# Altium PCB single channel esc.PcbDoc
Units mil, origin at the board's own origin, x right, y up, seen from the top; angles counter-clockwise.
Board outline 1580 x 830 mil, 6 copper layers (Top Layer, Layer 1, Layer 2, Layer 3, Layer 5, Bottom Layer), stack 32.112 mil thick; 44 components, 38 nets, 189 pads, 325 vias.
Unrouted connection lines stored in the file: 100.
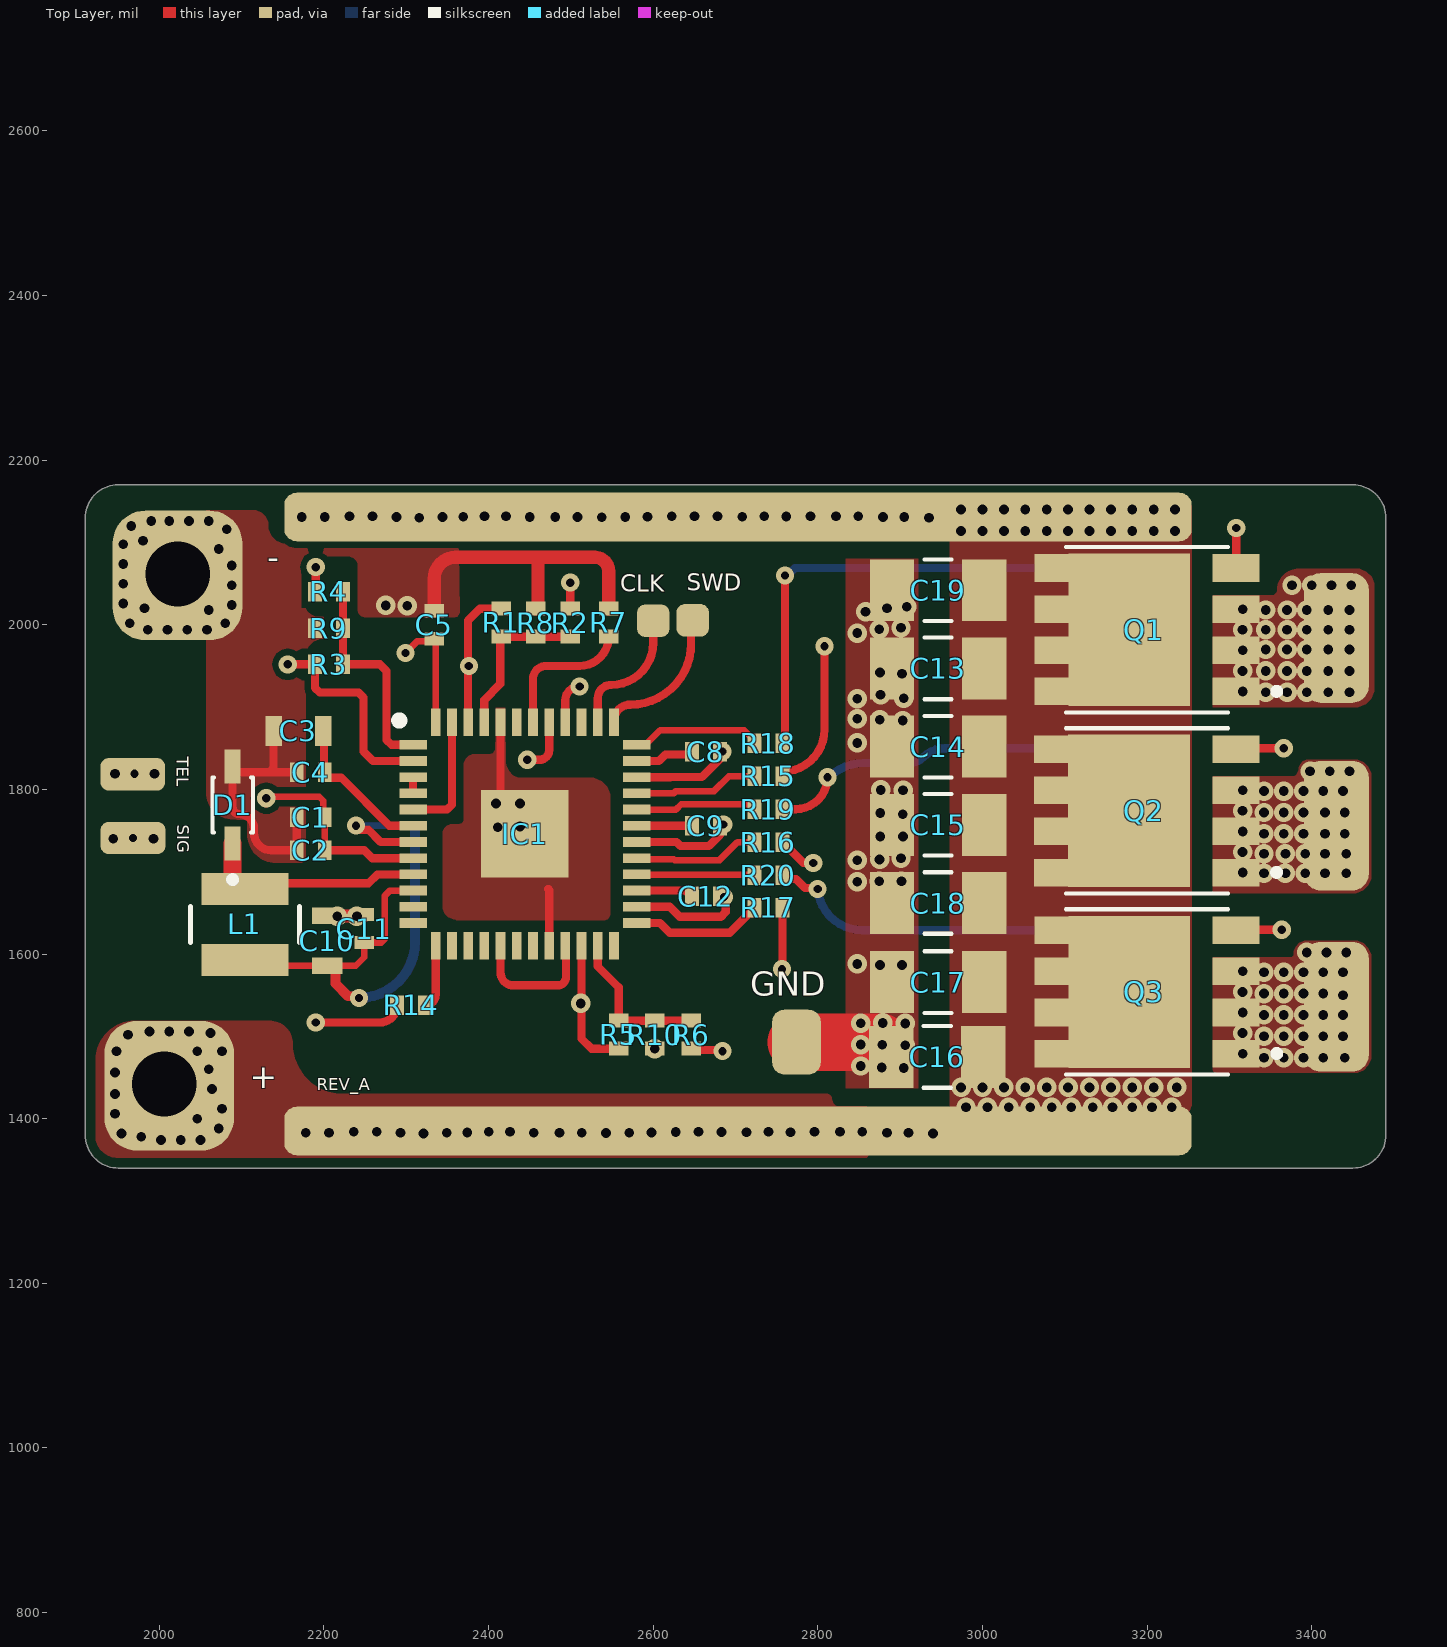
[diagram p0: Top Layer view]
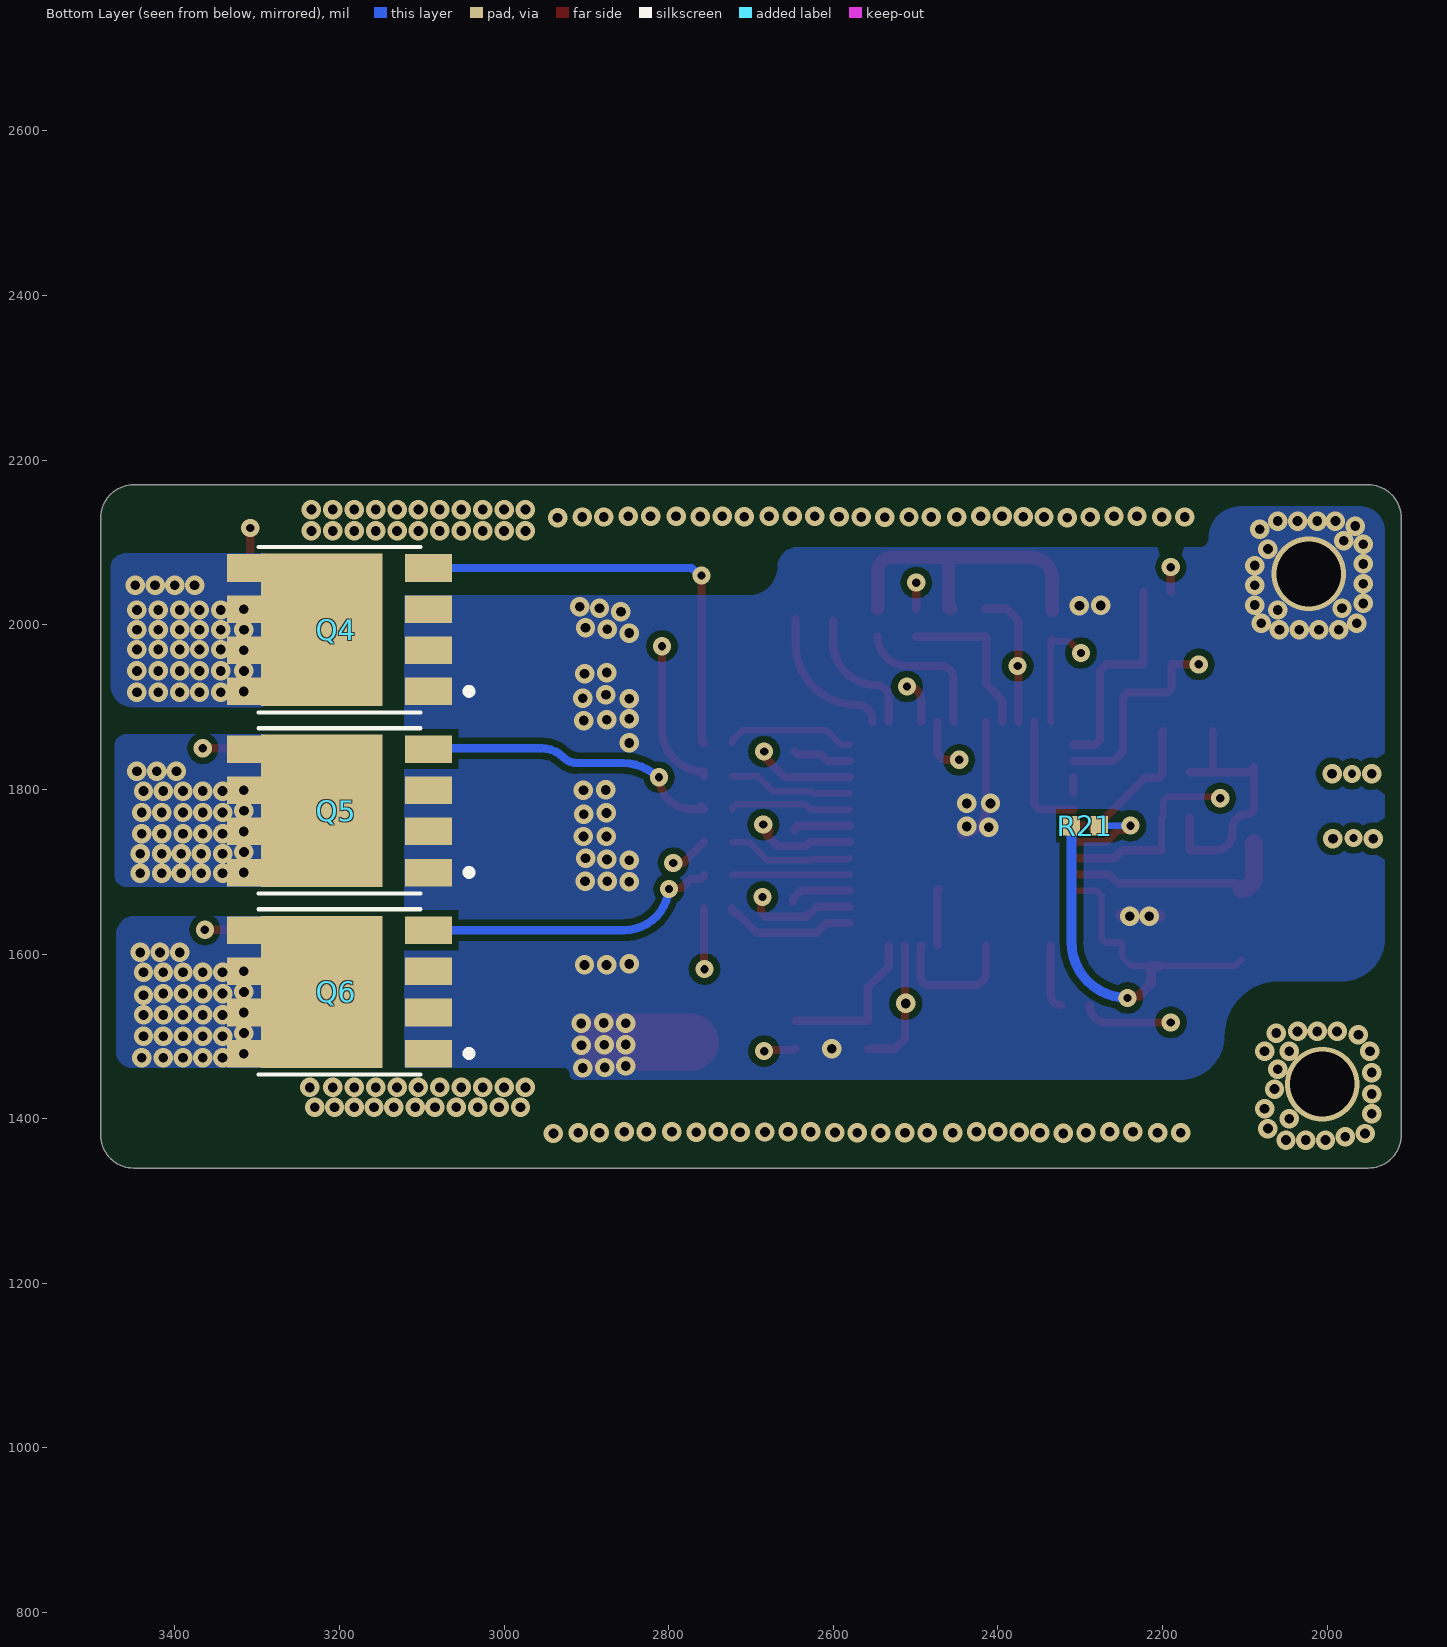
[diagram p1: Bottom Layer view, seen from below]
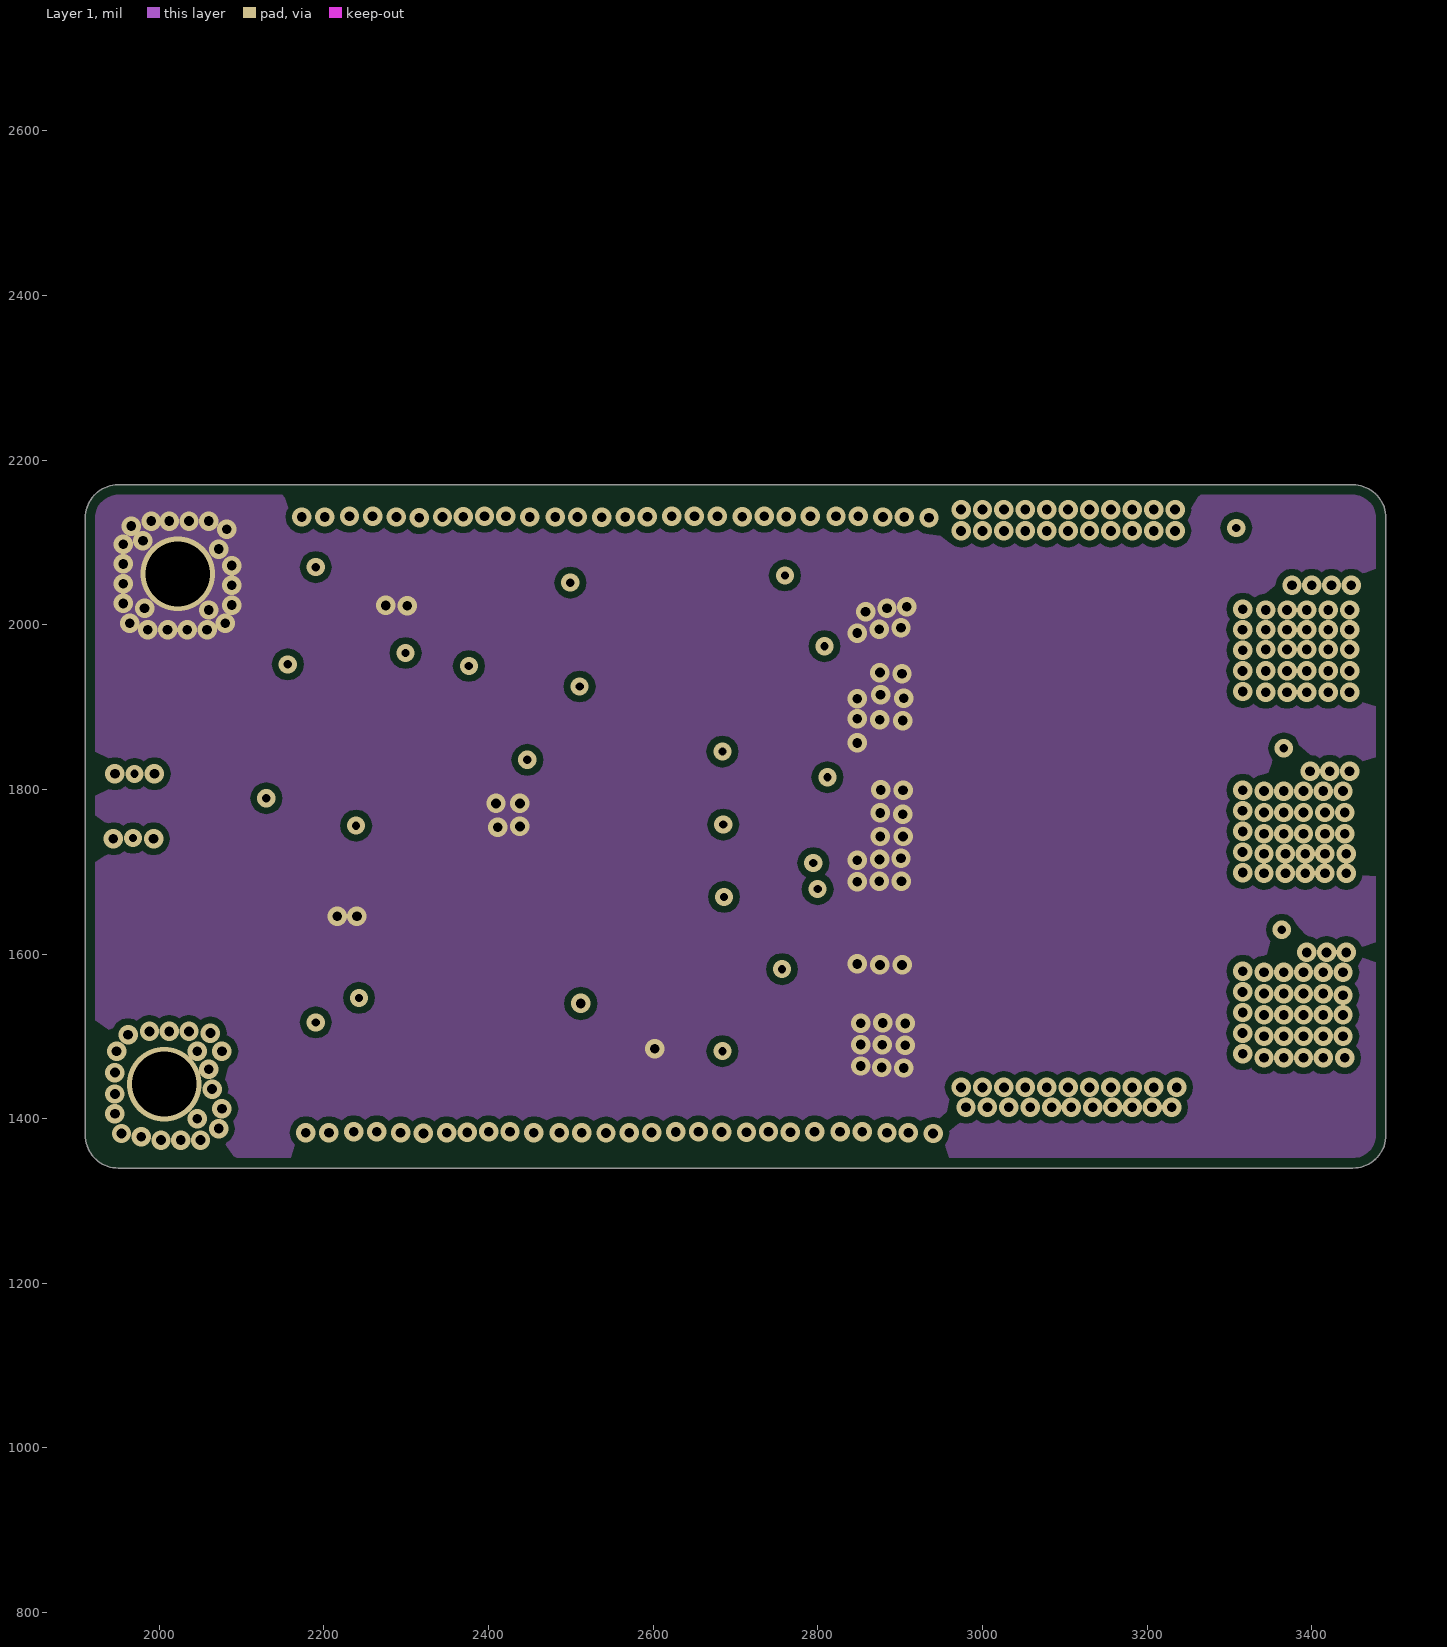
[diagram p2: Layer 1]
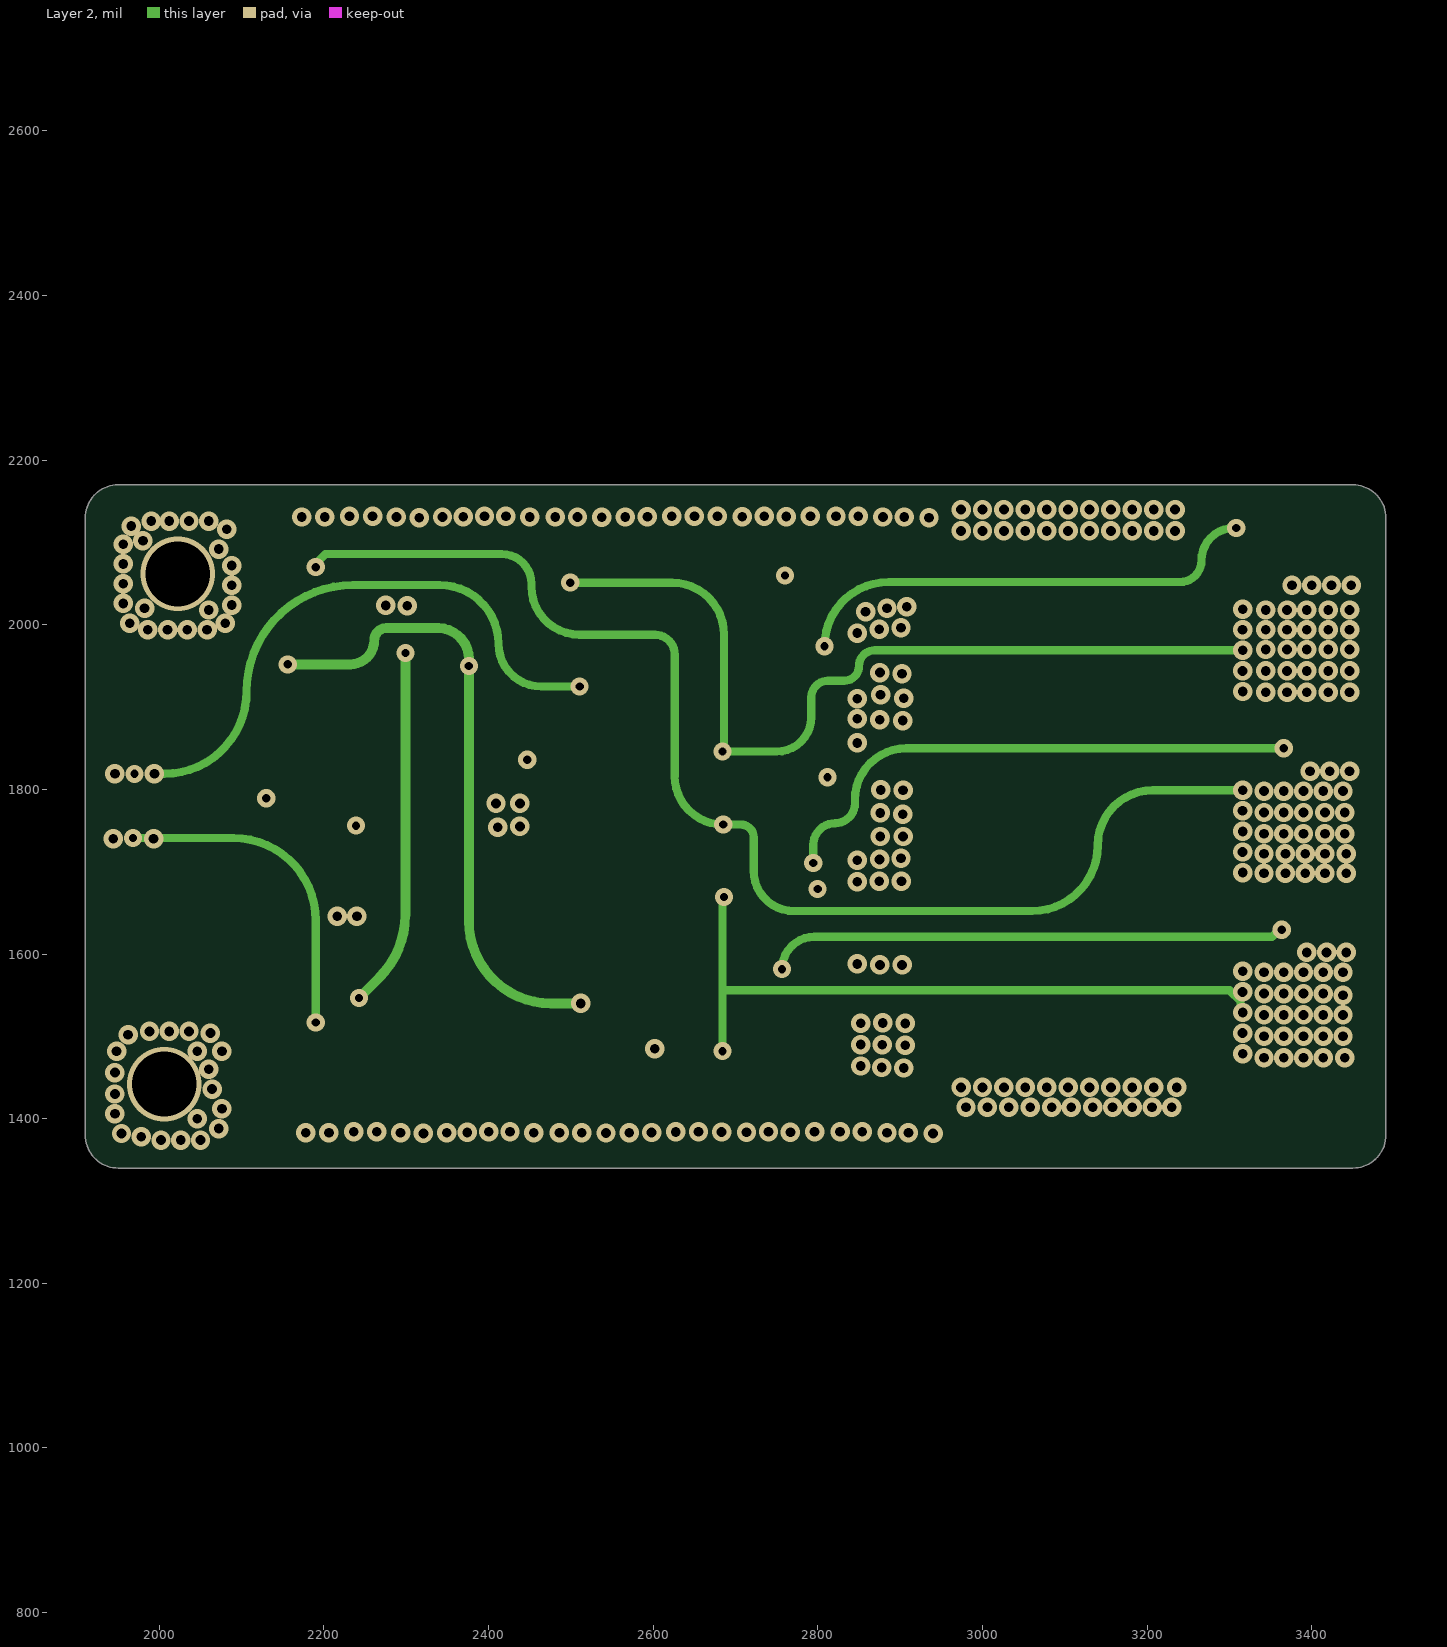
[diagram p3: Layer 2]
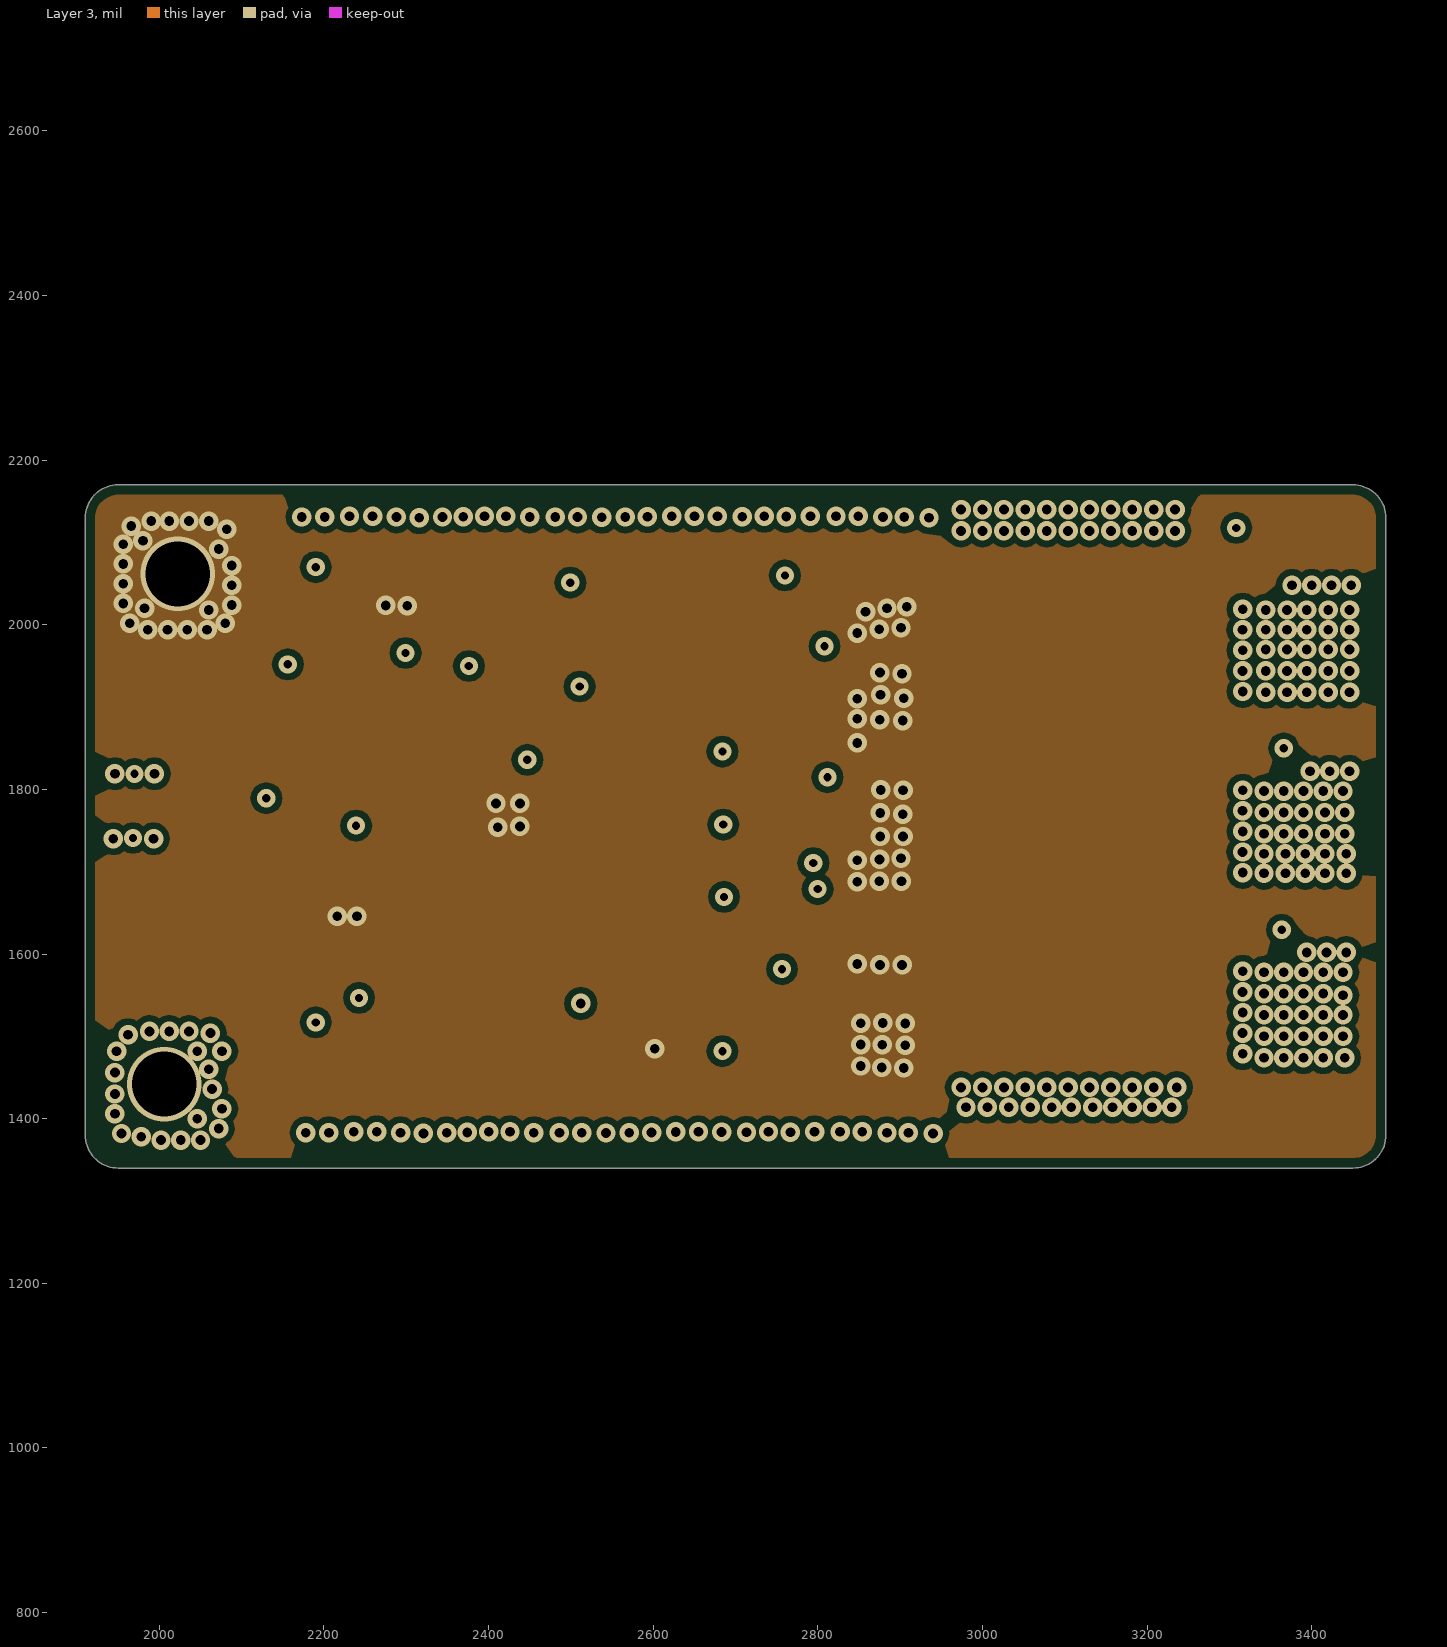
[diagram p4: Layer 3]
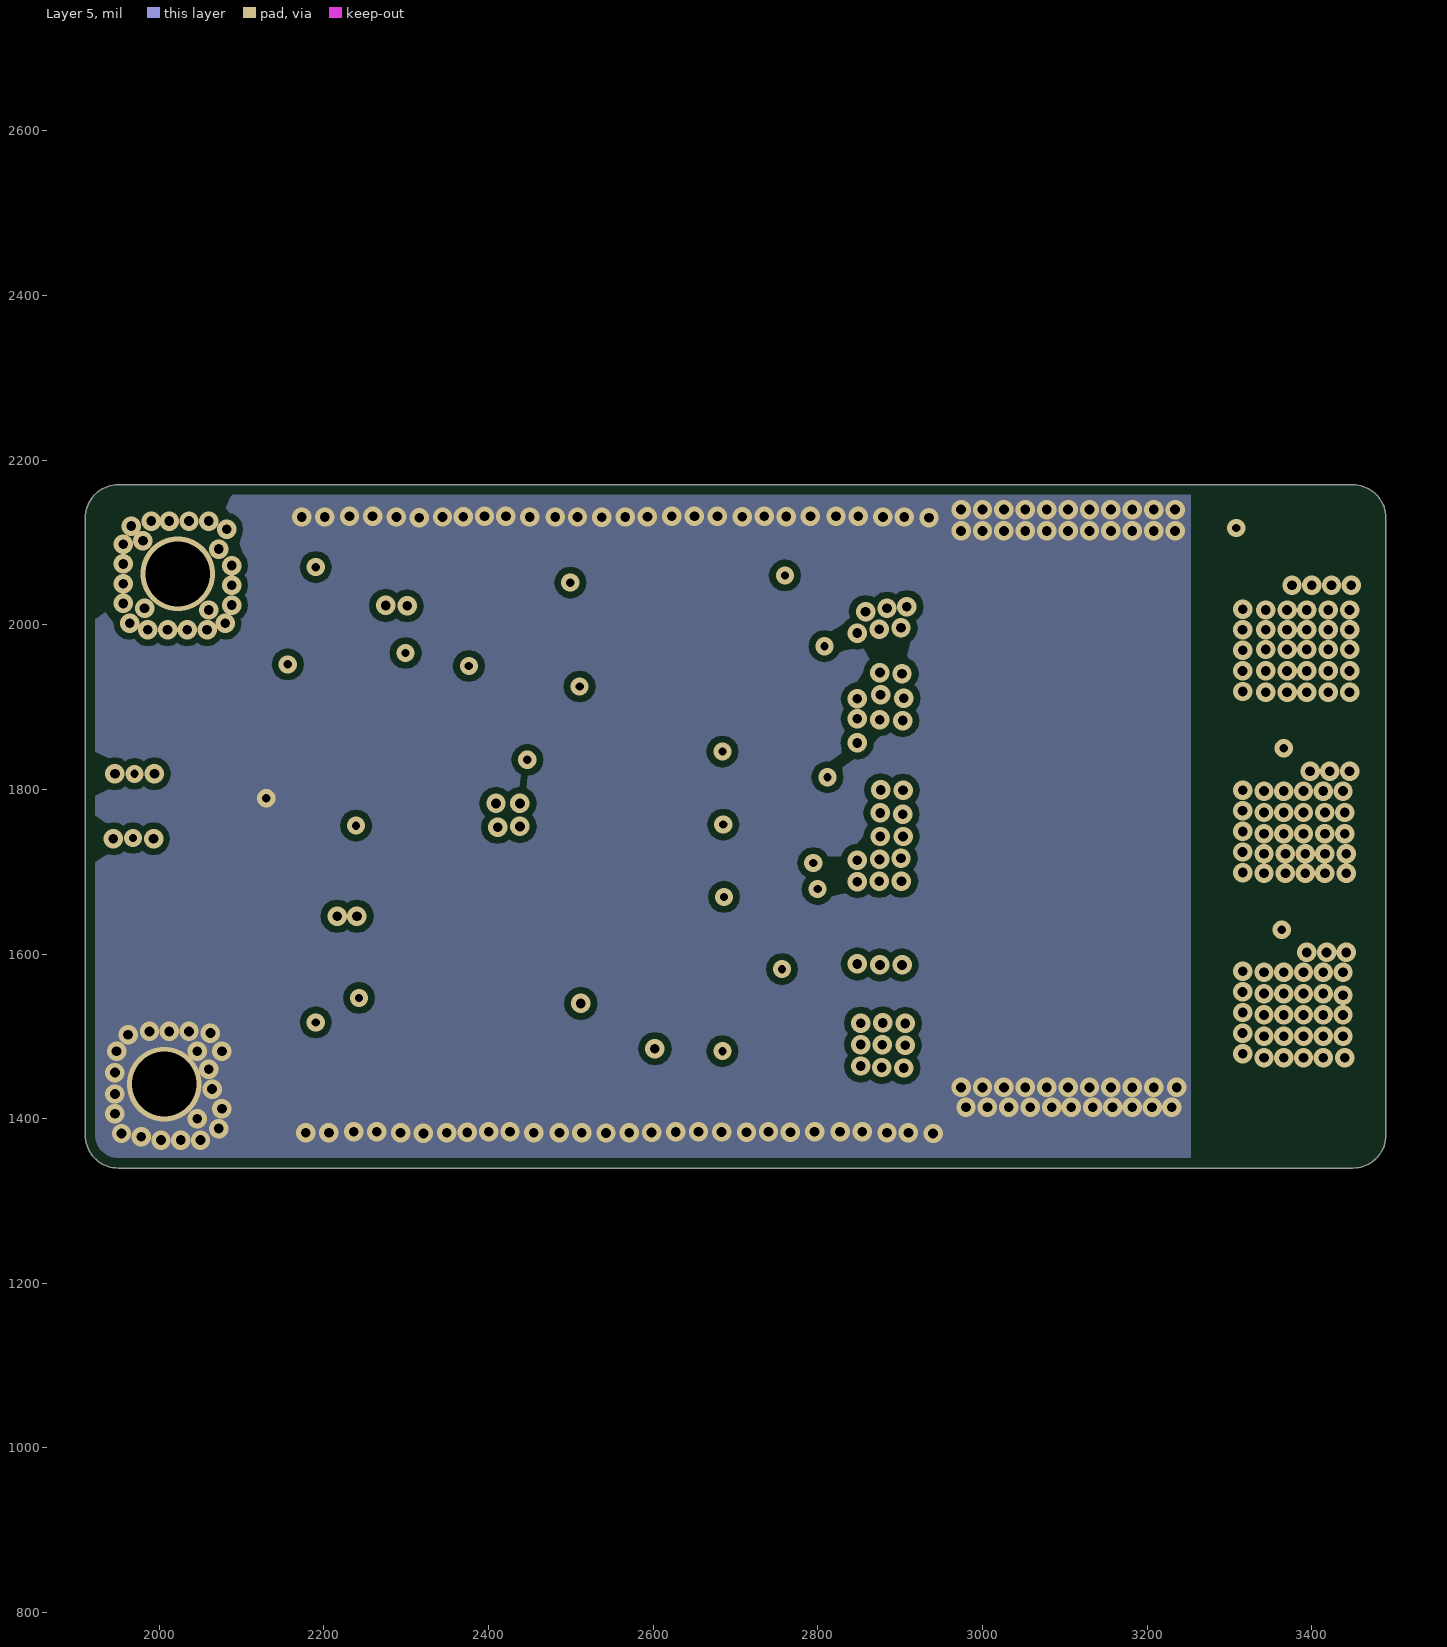
[diagram p5: Layer 5]
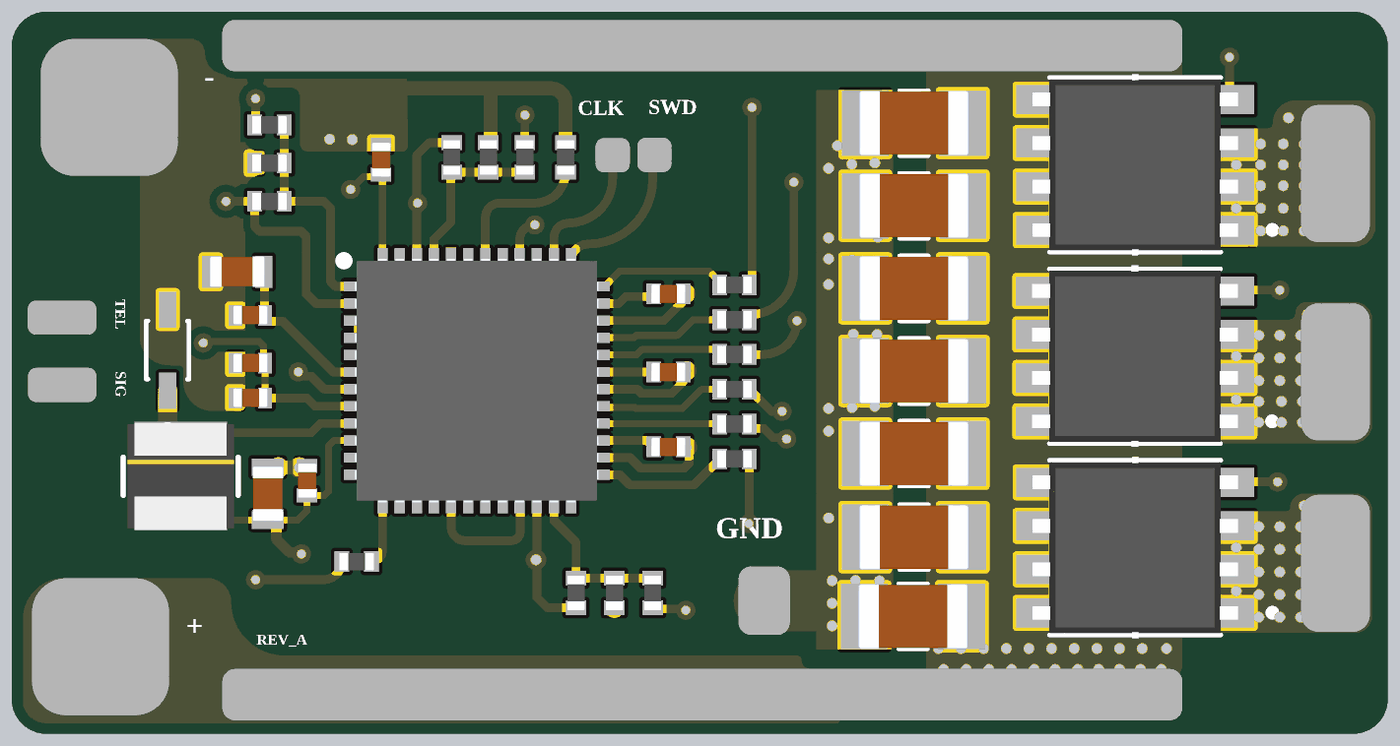
[diagram p6: 3D render of the assembled board from above, using the file's embedded part models]
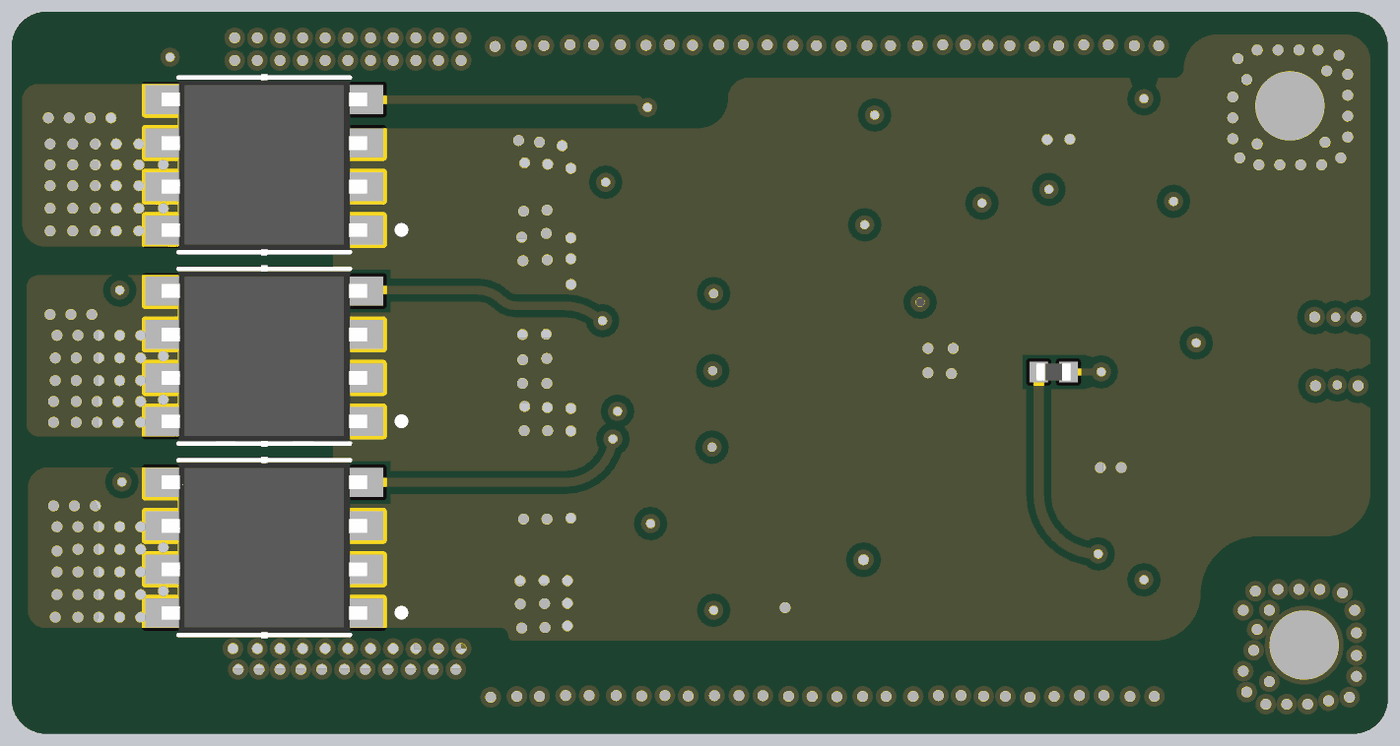
[diagram p7: 3D render of the assembled board from below, using the file's embedded part models]

## Layer stack, top to bottom
Top Solder: solder mask 0.4, Solder Resist, Dk 3.5
Top Layer: signal copper 1.4
Dielectric 4: prepreg 2.8, PP-006, Dk 4.1
Layer 1: signal copper 1.378
Dielectric 2: prepreg 2.8, PP-006, Dk 4.1
Layer 2: signal copper 1.378
Dielectric 1: dielectric 12.6, FR-4, Dk 4.8
Layer 3: signal copper 1.378
Dielectric 3: prepreg 2.8, PP-006, Dk 4.1
Layer 5: signal copper 1.378
Dielectric 5: prepreg 2.8, PP-006, Dk 4.1
Bottom Layer: signal copper 1.4
Bottom Solder: solder mask 0.4, Solder Resist, Dk 3.5

## Board outline
1910,1380 ccw(c1950,1380) 1950,1340 3450,1340 ccw(c3450,1380) 3490,1380 3490,2130 ccw(c3450,2130) 3450,2170 3090,2170 1950,2170 ccw(c1950,2130) 1910,2130

## Design rules (kind name [scope] priority, off if disabled: settings)
BoardOutlineClearance [All] p1: gap=12 ignorepadtopadclearanceinfootprint=FALSE
Clearance [All] p1: gap=8 ignorepadtopadclearanceinfootprint=TRUE
HoleSize [All] p1: absolutevalues=TRUE maxlimit=100 minlimit=10 maxpercent=80.000 minpercent=20.000
MinimumAnnularRing [All] p1: minimumring=5.2
PlaneConnect [All] p1: planeconnectstyle=Direct reliefexpansion=20 reliefentries=4 reliefconductorwidth=10 reliefairgap=10
PolygonConnect [All] p1: connectstyle=Direct reliefconductorwidth=10 reliefentries=4 polygonreliefangle="90 Angle" airgapwidth=10
RoutingVias [All] p1: holewidth=11.81 width=23.62 viastyle="Through Hole" minholewidth=10 minwidth=22 maxholewidth=400 maxwidth=400
SolderMaskExpansion [All] p1: expansion=4 istentingtop=FALSE
Width [All] p1: maxlimit=400 minlimit=8 preferedwidth=10
28 further rules are at their usual default settings.

## Components (designator, comment, footprint, x,y, rotation, side; value= is the part's Value field where it differs from the comment)
C1 "0.1uF" CAPC1005X55N#1 2184,1766 r0 top
C2 "0.1uF" CAPC1005X55N#1 2184,1726 r0 top
C3 "10uF" CAPC1608X90N 2169,1871 r0 top
C4 "0.1uF" CAPC1005X55N#1 2184,1821 r0 top
C5 "0.1uF" CAPC1005X55N#1 2334,2000 r270 top
C8 "680nF" CAPC1005X55N#2 2664,1846 r180 top
C9 "680nF" CAPC1005X55N#2 2664,1756 r180 top
C10 "47uF" CAPC1608X90N 2204,1616 r270 top
C11 "0.1uF" CAPC1005X55N#1 2249,1631 r270 top
C12 "680nF" CAPC1005X55N#2 2664,1670 r180 top
C13 "10uF" CAPC3216X190N 2946,1947 r0 top
C14 "10uF" CAPC3216X190N 2946,1852 r0 top
C15 "10uF" CAPC3216X190N 2946,1757 r0 top
C16 "10uF" CAPC3216X190N 2945,1475 r0 top
C17 "10uF" CAPC3216X190N 2946,1566 r0 top
C18 "10uF" CAPC3216X190N 2946,1662 r0 top
C19 "10uF" CAPC3216X190N 2946,2042 r0 top
D1 "B5819WS-TP" SOD2512X115N 2089,1781 r90 top
IC1 "STSPIN32F0ATR" QFN50P700X700X100-49N-D 2444,1746 r0 top
L1 "22uH" IND_BOURNS_SRN3015 2104,1636 r270 top
Q1 "TPHR8504PL,L1Q" TRANS_TPHR8504PL,L1Q 3200,1994 r180 top
Q2 "TPHR8504PL,L1Q" TRANS_TPHR8504PL,L1Q 3199.65,1774 r180 top
Q3 "TPHR8504PL,L1Q" TRANS_TPHR8504PL,L1Q 3200,1554 r180 top
Q4 "TPHR8504PL,L1Q" TRANS_TPHR8504PL,L1Q 3200,1994 r0 bottom
Q5 "TPHR8504PL,L1Q" TRANS_TPHR8504PL,L1Q 3200,1774 r0 bottom
Q6 "TPHR8504PL,L1Q" TRANS_TPHR8504PL,L1Q 3200,1554 r0 bottom
R1 "10K" RESC1005X37N#1 2415.22,2002.56 r90 top
R2 "10K" RESC1005X37N#1 2499.22,2002.56 r270 top
R3 "10K" RESC1005X37N#1 2206,1952 r180 top
R4 "10K" RESC1005X37N#1 2206,2040 r0 top
R5 "10K" RESC1005X37N#1 2558,1502 r270 top
R6 "10K" RESC1005X37N#1 2646,1502 r90 top
R7 "10K" RESC1005X37N#1 2546,2002.56 r270 top
R8 "1K" RESC1005X37N#1 2457.22,2002.56 r90 top
R9 "1K" RESC1005X37N#1 2206,1996 r180 top
R10 "1K" RESC1005X37N#1 2602,1502 r270 top
R14 "1K" RESC1005X37N#1 2306,1538 r0 top
R15 "22R" RESC1005X37N#1 2740,1816 r180 top
R16 "22R" RESC1005X37N#1 2740,1736 r180 top
R17 "22R" RESC1005X37N#1 2740,1656 r180 top
R18 "22R" RESC1005X37N#1 2740,1856 r180 top
R19 "22R" RESC1005X37N#1 2740,1776 r180 top
R20 "22R" RESC1005X37N#1 2740,1696 r180 top
R21 "10K" RESC1005X37N#2 2293.77,1755.84 r0 bottom

## Footprints (in the part's own frame and the unit in brackets; to place one, negate y for a bottom-side part, rotate by r counter-clockwise, add the part's x,y. Pads: shape width x height; smd on the part's side, far side on the other; paste and mask are expansions set on the pad)
CAPC1005X55N#1 [mil]
  rect 16x23.62 smd: 1(-17.01,0) 2(17.01,0)
  body extent -20,-10 20,11, height 20
CAPC1005X55N#2 [mil]
  rect 17x23.62 smd: 1(-17.01,0) 2(17.01,0)
  body extent -20,-11 20,11, height 20
CAPC1608X90N [mm]
  rect 0.508x0.93 smd: 1(-0.77,0) 2(0.77,0)
  body extent -0.8,-0.44 0.8,0.46, height 0.81
CAPC3216X190N [mm]
  rect 1.37x1.91 smd: 1(-1.421,0) 2(1.421,0)
  silkscreen extent -0.42,-0.95 0.42,0.95, body extent -1.6,-0.95 1.6,0.95, height 1.56
IND_BOURNS_SRN3015 [mil]
  rect 39x106 smd paste+0 mask+0: 1(-43,0) 2(43,0)
  silkscreen extent -22,-66 22,66, body extent -61,-61 61,61, height 59
QFN50P700X700X100-49N-D [mm]
  rect 0.85x0.3 smd: 1(-3.45,2.75) 2(-3.45,2.25) 3(-3.45,1.75) 4(-3.45,1.25) 5(-3.45,0.75) 6(-3.45,0.25) 7(-3.45,-0.25) 8(-3.45,-0.75) 9(-3.45,-1.25) 10(-3.45,-1.75) 11(-3.45,-2.25) 12(-3.45,-2.75) 25(3.45,-2.75) 26(3.45,-2.25) 27(3.45,-1.75) 28(3.45,-1.25) 29(3.45,-0.75) 30(3.45,-0.25) 31(3.45,0.25) 32(3.45,0.75) 33(3.45,1.25) 34(3.45,1.75) 35(3.45,2.25) 36(3.45,2.75)
  rect 0.3x0.85 smd: 13(-2.75,-3.45) 14(-2.25,-3.45) 15(-1.75,-3.45) 16(-1.25,-3.45) 17(-0.75,-3.45) 18(-0.25,-3.45) 19(0.25,-3.45) 20(0.75,-3.45) 21(1.25,-3.45) 22(1.75,-3.45) 23(2.25,-3.45) 24(2.75,-3.45) 37(2.75,3.45) 38(2.25,3.45) 39(1.75,3.45) 40(1.25,3.45) 41(0.75,3.45) 42(0.25,3.45) 43(-0.25,3.45) 44(-0.75,3.45) 45(-1.25,3.45) 46(-1.75,3.45) 47(-2.25,3.45) 48(-2.75,3.45)
  rect 2.7x2.7 smd: 49(0,0)
  silkscreen extent -4,3.38 -3.75,3.62, body extent -3.55,-3.55 3.55,3.55, height 1
RESC1005X37N#1 [mil]
  rect 17x23.62 smd: 1(-17.01,0) 2(17.01,0)
  body extent -20,-10 20,10, height 15
RESC1005X37N#2 [mil]
  rect 21.26x23.62 smd: 1(-17.01,0) 2(17.01,0)
  body extent -20,-10 20,10, height 15
SOD2512X115N [mm]
  rect 1.05x0.5 smd: A(1.185,0) C(-1.185,0)
  silkscreen extent -2.4,-0.63 0.85,0.63
TRANS_TPHR8504PL,L1Q [mm]
  rect 1.45x0.85 smd: 1(-2.75,1.905) 2(-2.75,0.635) 3(-2.75,-0.635) 4(-2.75,-1.905)
  rect 1.05x0.85 smd: 5(2.95,-1.905) 6(2.95,-0.635) 7(2.95,0.635) 8(2.95,1.905)
  rect 3.75x4.7 smd paste-3: 9(0.55,0)
  silkscreen extent -4.1,-2.55 2.5,2.55, body extent -3,-2.65 3,2.65, height 1

## Part data
C1 C2 C4 C5 C8 C9 C11 C12: library part GRM1555C1H222JA01D, Package=None, Availability=Unavailable, MP=GRM1555C1H222JA01D, Price=None
C3 C10: library part GRM188R71E224JA88D, "SMD Capacitor X7R(EIA) with Capacitance: 0.22uF Tol. 5%. Rated Voltage: 25Vdc", Package=None, Availability=Unavailable, MP=GRM188R71E224JA88D, Price=None
C13 C14 C15 C16 C17 C18 C19: library part GRM31CC80G227ME11K, "Ceramic Capacitor", Package=None, Availability=Unavailable, MP=GRM31CC80G227ME11K, Price=None
D1: Package=None, Availability=Unavailable, MF="{'manufacturer': u'Micro Commercial Components'}", MP=B5819WS-TP, Price=None
IC1: "Integrated Circuit", Manufacturer_Name=STMicroelectronics, Mouser Part Number=511-STSPIN32F0ATR, Arrow Part Number=STSPIN32F0ATR, Arrow Price/Stock=https://www.arrow.com/en/products/stspin32f0atr/stmicroelectronics, Datasheet Link=http://www.st.com/content/ccc/resource/technical/document/datasheet/group3/3d/88/0f/d1/3f/0c/49/80/DM00406030/files/DM00406030.pdf/jcr:content/translations/en.DM00406030.pdf, Height=1mm, Manufacturer_Part_Number=STSPIN32F0ATR, Mouser Price/Stock=https://www.mouser.co.uk/ProductDetail/STMicroelectronics/STSPIN32F0ATR?qs=1mbolxNpo8flc7yUpKWOVQ%3D%3D
L1: library part SRN3015-220M, "No Description Available", MFR_NAME="Bourns Electronics", COPYRIGHT="Copyright (C) 2022 Ultra Librarian. All rights reserved.", DIGI-KEY_PART_NUMBER_1=SRN3015-220MCT-ND, DIGI-KEY_PART_NUMBER_2=SRN3015-220MDKR-ND, DIGI-KEY_PART_NUMBER_3=SRN3015-220MTR-ND, Manufacturer_Part_Number=SRN3015-220M, RefDes=RefDes, Type=DEV
Q1 Q2 Q3 Q4 Q5 Q6: "N-Channel 40V 150A (Tc) 1W (Ta), 170W (Tc) Surface Mount 8-SOP Advance (5x5)", Package="SOP-8 Toshiba", Availability=Unavailable, MF="Toshiba Semiconductor", MP=TPHR8504PL,L1Q, Price=None, SnapEDA_Link=https://www.snapeda.com/parts/TPHR8504PL,L1Q/Toshiba%20Semiconductor%20and%20Storage/view-part/604439/?ref=snap
R1 R2 R3 R4 R5 R6 R7 R8 R9 R10 R14 R15 R16 R17 R18 R19 R20 R21: library part RE0402BRE07330KL, Package=None, Availability=Unavailable, MF="{'manufacturer': u'Yageo'}", MP=RE0402BRE07330KL, Price=None

## Free pads (board coordinates)
  rrect50% 78.74x39.37 smd mask-3: 0.8MM(1967.78,1818.32) 0.8MM(1968,1741)
  rrect50% 157.48x157.48 smd mask-3: 0.8MM(2012,1440) 0.8MM(2022,2060)
  rrect50% 39.37x39.37 smd mask-3: 0.8MM(2600,2005) 0.8MM(2647.91,2005.38)
  rrect50% 1102.36x59.06 smd mask-3: 0.8MM(2703,1385) 0.8MM(2703,2131)
  rrect50% 59.06x78.74 smd mask-3: 0.8MM(2774,1493)
  rrect50% 78.74x157.48 smd mask-3: 0.8MM(3430,1536) 0.8MM(3430,1756) 0.8MM(3430,1984)

## Via types
v1: diameter 23.62, hole 11.81, Top Layer to Bottom Layer, tented both sides, 297 vias
v2: diameter 22, hole 10, Top Layer to Bottom Layer, tented both sides, 26 vias
v3: diameter 90.55, hole 78.74, Top Layer to Bottom Layer, tented both sides, 2 vias

## Nets (pads, with @x,y where several pads share a name; then routed paths per layer and width w, separated by ;. In a path a pad name is that pad's centre, name@x,y a point inside that pad or via, vN(x,y) a via of type N, cw(c..) or ccw(c..) an arc to the next point about the centre after c; other vN are vias at no path point)
3V32: C5.2 C10.2 C11.2 IC1.10 IC1.48 L1.2 R21.2 | length 1175.4
  Top Layer w8: L1.2 2111.32,1585.68 C10.2 ; C10.2@2214.32,1585.68 2238.68,1585.68 2249,1596 C11.2 2269.31,1613.99 2274,1618.68 2274,1671 2280.1,1677.1 IC1.10 ; v2(2299.1,1965.73) 2313.57,1980.2 2331.2,1980.2 C5.2 cw(c2334,1981.26) 2335.73,1981.26 IC1.48
  Top Layer w12: C10.2 C10.2@2214.32,1585.68 ; C10.2@2209.86,1585.68 2213.86,1581.68 2213.86,1564.07 2229.26,1548.67 2240.62,1548.67 v2(2242.53,1546.76)
  Layer 2 w12: v2(2242.53,1546.76) 2267.28,1571.52 ccw(c2191.67,1647.21) 2298.66,1647.21 2299.1,1647.65 v2(2299.1,1965.73)
  Bottom Layer w12: v2(2242.53,1546.76) ccw(c2242.53,1615.01) 2310.78,1615.01 R21.2
6S: C1.2 C2.2 C13.2 C14.2 C15.2 C16.2 C17.2 C18.2 C19.2 IC1.8 pad.0.8MM@2012,1440 pad.0.8MM@2703,1385 pad.0.8MM@2703,2131 Q1.5 Q1.6 Q1.7 Q1.8 Q1.9 Q2.5 Q2.6 Q2.7 Q2.8 Q2.9 Q3.5 Q3.6 Q3.7 Q3.8 Q3.9 | length 255.7
  Top Layer w8: v2(2129.91,1789.3) 2129.91,1782.09 2130,1782 cw(c2139,1782) 2139,1791 2194.31,1791 2199,1786.31 2199,1768.01 C1.2 C2.2
  Top Layer w10: C2.2 2249,1726 2258.53,1716.47 IC1.8
  other v1: 2002,1374 2026,1374 2050,1374 1978,1378 1954,1382 2320.78,1382.11 2940,1382 2178,1383 2206,1383 2293,1383 2349,1383 2374.07,1383.25 2455,1383 2486,1383 2513,1383 2542.61,1382.62 2571,1383 2597.97,1383.24 2713.27,1383.42 2766.64,1383.44 2884,1383 2910,1383 2236,1384 2264,1384 2400,1384 2426,1384 2627.5,1383.85 2655,1384 2683.03,1383.84 2740,1384 2796,1384 2827,1384 2854,1384 2072,1388 2046,1400 1946,1406 2076,1412 2980,1414 3006,1414 3032,1414 3058,1414 3084,1414 3108,1414 3134,1414 3158,1414 3182,1414 3206,1414 3230,1414 1946,1430 2064,1436 2974,1438 3000,1438 3026,1438 3052,1438 3078,1438 3104,1438 3130,1438 3156,1438 3182,1438 3208,1438 3236,1438 1946,1456 2060,1460 1948,1482 2046,1482 2076,1482 1962,1502 2062,1504 1988,1506 2012,1506 2036,1506 2974,2114 3000,2114 3026,2114 3052,2114 3078,2114 3104,2114 3130,2114 3156,2114 3182,2114 3208,2114 3234,2114 2315.78,2130.11 2935,2130 2173,2131 2201,2131 2288,2131 2344,2131 2369.07,2131.25 2450,2131 2481,2131 2508,2131 2537.61,2130.62 2566,2131 2592.97,2131.24 2708.27,2131.42 2761.64,2131.44 2879,2131 2905,2131 2231,2132 2259,2132 2395,2132 2421,2132 2622.5,2131.85 2650,2132 2678.03,2131.84 2735,2132 2791,2132 2822,2132 2849,2132 2974,2140 3000,2140 3026,2140 3052,2140 3078,2140 3104,2140 3130,2140 3156,2140 3182,2140 3208,2140 3234,2140
  other v3: 2006,1442
BEMFA2: IC1.45 R1.1 R2.2 R8.1 | length 196.2
  Top Layer w10: IC1.45 2394.79,1908.79 2414,1928 2414,1984.33 R1.1 R8.1 R2.2
BEMFB2: IC1.1 R3.1 R4.2 R9.1 | length 262.8
  Top Layer w10: R4.2 R9.1 R3.1 2268,1952 2276,1944 2276,1860.13 2281.86,1854.27 IC1.1
BEMFC2: IC1.23 R5.1 R6.2 R10.1 | length 189.7
  Top Layer w10: IC1.23 2532.58,1585.09 2558,1559.67 R5.1 R10.1 R6.2
BOOT02: IC1.42 R7.2 | length 173.7
  Top Layer w10: IC1.42 2453.84,1933.84 cw(c2470,1933.84) 2470,1950 2510.45,1950 ccw(c2510.45,1985.55) R7.2
CLK2: IC1.38 pad.0.8MM@2600,2005 | length 161.7
  Top Layer w10: IC1.38 2532.58,1910.58 cw(c2549,1910.58) 2549,1927 ccw(c2549,1978) 2600,1978 pad.0.8MM@2600,2005
ESC2: pad.0.8MM@1968,1741 R14.1 | length 514.1
  Top Layer w10: v2(2190,1517) 2267.99,1517 ccw(c2267.99,1538) R14.1
  Layer 2 w10: v2(1968,1741) 2090,1741 cw(c2090,1641) 2190,1641 v2(2190,1517)
  other v1: 1944,1740 1993,1740
GHA2: IC1.33 R15.2 | length 151.8
  Top Layer w8: IC1.33 2624.59,1795.21 2627.37,1798 2674,1798 2692,1816 R15.2
GHB2: IC1.29 R16.2 | length 153.1
  Top Layer w8: IC1.29 2581.05,1715.25 2625.01,1715.25 2626.07,1714.19 2680.68,1714.19 2702.49,1736 R16.2
GHC2: IC1.25 R17.2 | length 162.4
  Top Layer w10: IC1.25 2608.27,1637.73 2620,1626 2692.99,1626 2716.18,1649.19 2719.49,1649.19 2722.99,1652.69 R17.2
GLA2: IC1.36 R18.2 | length 159.1
  Top Layer w8: IC1.36 2590.65,1854.27 2608.39,1872 2710.3,1872 2722.99,1859.31 R18.2
GLB2: IC1.32 R19.2 | length 149.2
  Top Layer w8: IC1.32 2627.53,1775.53 2634,1782 2718.49,1782 2722.99,1777.5 R19.2
GLC2: IC1.28 R20.2 | length 143.5
  Top Layer w8: IC1.28 2580.22,1696.39 2722.6,1696.39 R20.2
GND: C1.1 C2.1 C3.1 C4.1 C5.1 C10.1 C11.1 C13.1 C14.1 C15.1 C16.1 C17.1 C18.1 C19.1 D1.A IC1.20 IC1.44 IC1.49 pad.0.8MM@2022,2060 pad.0.8MM@2774,1493 Q4.1 Q4.2 Q4.3 Q5.1 Q5.2 Q5.3 Q6.1 Q6.2 Q6.3 R7.1 R8.2 R9.2 R10.2 | length 1099.6
  Top Layer w10: C3.1 2138.68,1828.36 cw(c2131.32,1828.36) 2131.32,1821 ; C1.1 C2.1 2136,1726 cw(c2136,1747) 2115,1747 2115,1752 ccw(c2097,1752) 2097,1770 cw(c2097,1778) 2089,1778 D1.A ccw(c2095.65,1827.65) 2095.65,1821 2131.32,1821 ; C4.1 2131.32,1821 ; IC1.49@2414.47,1775.53 IC1.44 ; 2472,1679 cw(c2472,1677.47) 2473.53,1677.47 IC1.20
  Top Layer w12: IC1.49@2414.47,1775.53 ccw(c2444,1775.53) IC1.49
  Top Layer w16: C10.1 2247.31,1646.32 ccw(c2247.31,1648.01) C11.1 ; C5.1 2334,2056.18 cw(c2359.82,2056.18) 2359.82,2082 2468,2082 ; R8.2 ccw(c2457.22,2022.35) 2460,2022.35 2460,2074 cw(c2468,2074) 2468,2082 ; R7.1 2546,2065 ccw(c2529,2065) 2529,2082 2468,2082
  Top Layer w70: pad.0.8MM@2774,1493 2874.87,1493 cw(c2874.87,1489.66) v1(2878.21,1489.66)
  other v1: 2877.65,1462.16 2904.31,1461.6 2852,1464 2602,1484.99 2906,1489.1 2852,1490 2852,1516 2878.77,1516.33 2906.28,1515.77 2875.41,1586.81 2902.28,1586.81 2848,1588 2216,1646 2240,1646 2848,1688 2874.71,1688.39 2901.55,1688.39 2848,1714 2874.99,1714.96 2901,1716.35 2875.64,1742.79 2903.55,1742.79 2411,1754 2438,1755 2903.18,1769.96 2875.64,1771.43 2409,1783 2438,1783 2876.37,1799.34 2903.55,1798.98 2847.78,1856.48 2903.01,1883.68 2875.09,1884.77 2848,1886 2848,1910 2904.38,1910.78 2876.19,1915.16 2902.19,1940.61 2875.36,1941.98 2848,1990 1986,1994 2010,1994 2034,1994 2058,1994 2874.68,1994.71 2901.01,1996.26 1964,2002 2080,2002 2858,2016 2060,2018 1982,2020 2884,2020 2908,2022 2301,2023 2088,2024 2275,2023.51 1956,2026 2088,2048 1956,2050 2088,2072 1956,2074 2072,2092 1956,2098 1980,2102 2082,2116 1966,2120 1990,2126 2012,2126 2036,2126 2060,2126
  other v3: 2022.39,2061.76
IO2: IC1.37 pad.0.8MM@2647.91,2005.38 | length 178.7
  Top Layer w10: IC1.37 2552.27,1883.27 cw(c2572,1883.27) 2572,1903 ccw(c2572,1977) 2646,1977 pad.0.8MM@2646,2007
MOTOR2A: C8.1 IC1.34 pad.0.8MM@3430,1984 Q1.1 Q1.2 Q1.3 Q4.5 Q4.6 Q4.7 Q4.8 Q4.9 R2.1 | length 1230.9
  Top Layer w10: R2.1 v2(2499.22,2051.22) ; IC1.34 2620.23,1814.9 2620.33,1815 2659,1815 2684,1840 v2(2684,1846)
  Layer 2 w10: v2(2499.22,2051.22) 2622.78,2051.22 cw(c2622.78,1988) 2686,1988 2686,1848 cw(c2684,1848) v2(2684,1846) 2750,1846 ccw(c2750,1888) 2792,1888 2792,1912 cw(c2812,1912) 2812,1932 2832,1932 ccw(c2832,1950) 2850,1950 cw(c2869,1950) 2869,1969 v1(3316.14,1969)
  other v1: 3344,1918 3370,1918 3394,1918 3420,1918 3446,1918 3316.14,1919 3316,1944 3344,1944 3370,1944 3394,1944 3420,1944 3446,1944 3344,1970 3370,1970 3394,1970 3420,1970 3446,1970 3316,1994 3344,1994 3370,1994 3394,1994 3420,1994 3446,1994 3344,2018 3370,2018 3394,2018 3420,2018 3446,2018 3316.14,2019 3376,2048 3400,2048 3424,2048 3448,2048
MOTOR2B: C9.1 IC1.30 pad.0.8MM@3430,1756 Q2.1 Q2.2 Q2.3 Q5.5 Q5.6 Q5.7 Q5.8 Q5.9 R4.1 | length 1710.6
  Top Layer w10: R4.1 2190.22,2041.23 2190,2041.45 v2(2190,2070) ; IC1.30 2628.14,1736.16 2633.11,1731.19 2667.51,1731.19 2681.01,1744.69 C9.1@2681.01,1753.25 ; C9.1@2677.51,1749.75 C9.1@2681.01,1753.25 ; C9.1 C9.1@2681.01,1753.25 ; v2(2685.06,1757.31) C9.1@2681.01,1753.25
  Layer 2 w10: v2(2190,2070) 2190,2074.41 2190.22,2074.63 2201.58,2085.98 2416.02,2085.98 cw(c2416.02,2050) 2452,2050 2452,2046.39 ccw(c2510.39,2046.39) 2510.39,1988 2510.46,1988 2602,1988 cw(c2602,1964) 2626,1964 2626,1816.37 ccw(c2685.06,1816.37) v2(2685.06,1757.31) 2706.69,1757.31 cw(c2706.69,1742) 2722,1742 2722,1701.35 ccw(c2771.17,1701.35) 2771.17,1652.18 3060.18,1652.18 ccw(c3060.18,1732) 3140,1732 cw(c3207,1732) 3207,1799 v1(3316.14,1799)
  other v1: 3342,1698 3368,1698 3392,1698 3416,1698 3442,1698 3316.14,1699 3342,1722 3368,1722 3392,1722 3416,1722 3442,1722 3316,1724 3342,1746 3366,1746 3390,1746 3416,1746 3440,1746 3316.14,1749 3342,1772 3366,1772 3390,1772 3416,1772 3440,1772 3316,1774 3342,1798 3366,1798 3390,1798 3414,1798 3438,1798 3398,1822 3422,1822 3446,1822
MOTOR2C: C12.1 IC1.26 pad.0.8MM@3430,1536 Q3.1 Q3.2 Q3.3 Q6.5 Q6.6 Q6.7 Q6.8 Q6.9 R6.1 | length 1004.5
  Top Layer w10: IC1.26 2620.11,1657.42 2632.34,1645.19 2682.07,1645.19 2687.97,1651.09 C12.1@2687.97,1663.47 ; R6.1 2647.5,1483.5 2682.5,1483.5 v2(2684,1482)
  Layer 2 w10: v2(2684,1482) 2684,1667.5 v2(2685.97,1669.47) ; 2684.99,1556 3300.33,1556 3313.54,1542.79 3313.54,1531.61 v1(3316.14,1529)
  other v1: 3342,1474 3366,1474 3390,1474 3414,1474 3440,1474 3316.14,1479 3342,1500 3366,1500 3390,1500 3414,1500 3438,1500 3316,1504 3342,1526 3366,1526 3390,1526 3414,1526 3438,1526 3438,1550 3342,1552 3366,1552 3390,1552 3414,1552 3316,1554 3342,1578 3366,1578 3390,1578 3414,1578 3438,1578 3316.14,1579 3394,1602 3418,1602 3442,1602
NetC8_2: C8.2 IC1.35 | length 71.9
  Top Layer w10: IC1.35 2606.8,1834.58 2614.81,1842.59 2643.58,1842.59 C8.2
NetC9_2: C9.2 IC1.31 | length 71
  Top Layer w10: IC1.31 2643.49,1755.84 2646.99,1752.34 C9.2@2646.99,1750
NetC12_2: C12.2 IC1.27 | length 76.5
  Top Layer w10: IC1.27 2639.2,1677.1 2648.99,1667.31 C12.2@2648.99,1664
NetD1_C: D1.C IC1.9 L1.1 | length 275.4
  Top Layer w10: L1.1 2111,1686 2254,1686 2264.79,1696.79 IC1.9
  Top Layer w22: D1.C 2089,1694 ccw(c2104,1694) L1.1
NetIC1_3: IC1.3 IC1.4 | length 19.7
  Top Layer w10: IC1.4 IC1.3
NetIC1_7: IC1.7 R21.1 | length 118.2
  Top Layer w8: v2@2239,1751 v2(2239,1756)
  Top Layer w10: v2@2239,1751 2254,1751 2268.84,1736.16 IC1.7
  Bottom Layer w8: v2(2239,1756) 2276.77,1756 R21.1
NetIC1_13: IC1.13 R14.2 | length 79.4
  Top Layer w10: R14.2 ccw(c2323.01,1550.72) 2335.73,1550.72 IC1.13
NetQ1_4: Q1.4 R15.1 | length 818.1
  Top Layer w10: R15.1 2757.01,1821.62 ccw(c2757.01,1872.61) 2808,1872.61 v2(2808,1974) ; Q1.4 v2(3308.27,2117.73)
  Layer 2 w10: v2(2808,1974) cw(c2886,1974) 2886,2052 3240,2052 ccw(c3240,2078) 3266,2078 cw(c3305.73,2078) 3305.73,2117.73 v2(3308.27,2117.73)
NetQ2_4: Q2.4 R16.1 | length 768.9
  Top Layer w10: R16.1 2782.33,1710.68 v2(2794.44,1710.68) ; Q2.4 cw(c3308.92,1849) 3308.92,1850 v2(3366,1850)
  Layer 2 w10: v2(2794.44,1710.68) 2794.44,1732.44 cw(c2821,1732.44) 2821,1759 ccw(c2821,1782.98) 2844.98,1782.98 2844.98,1787.43 cw(c2907.61,1787.37) 2907.61,1850 v2(3366,1850)
NetQ3_4: Q3.4 R17.1 | length 763.7
  Top Layer w10: v2(2756.44,1581.62) 2757.01,1582.19 R17.1 ; Q3.4 cw(c3309.27,1629) 3309.27,1630 3309.72,1629.55 v2(3363.53,1629.55)
  Layer 2 w10: v2(2756.44,1581.62) cw(c2795.82,1581.62) 2795.82,1621 3351.73,1621 3360.28,1629.55 v2(3363.53,1629.55)
NetQ4_4: Q4.4 R18.1 | length 540.7
  Top Layer w10: R18.1 2760,1858.99 v2(2760,2060)
  Bottom Layer w10: v2(2760,2060) 2762.95,2060 2771.95,2069 Q4.4
NetQ5_4: Q5.4 R19.1 | length 373.5
  Top Layer w10: R19.1@2760.51,1779.5 R19.1 2772.81,1776 ccw(c2772.81,1814.82) v2(2811.63,1814.82) v2@2809.96,1814.82
  Bottom Layer w10: v2(2811.63,1814.82) 2813.69,1814.82 cw(c2855.17,1773.33) 2855.17,1832 2911.1,1832 ccw(c2911.1,1855.9) 2928,1839 cw(c2954.56,1812.44) 2954.56,1850 3090.73,1850 cw(c3090.73,1849) Q5.4
NetQ6_4: Q6.4 R20.1 | length 369.4
  Top Layer w10: R20.1 2757.01,1694.55 2760.51,1691.05 2773.58,1691.05 2784.36,1680.27 2798.34,1680.27 v2(2799.73,1678.88)
  Bottom Layer w10: v2(2799.73,1678.88) 2799.91,1678.89 ccw(c2854,1683.27) 2854,1629 Q6.4
PA62: IC1.17 IC1.21 | length 165.2
  Top Layer w10: IC1.17 2414.47,1577.53 ccw(c2430,1577.53) 2430,1562 2484,1562 ccw(c2484,1572) 2494,1572 2494,1592.79 ccw(c2484,1592.84) 2494,1593.1 cw(c2506.99,1593.44) 2493.99,1593.44 2493.99,1606.16 ccw(c2483.99,1606.16) IC1.21@2493.1,1610.28
PF12: IC1.5 IC1.47 | length 150.1
  Top Layer w10: IC1.5 2349.56,1775.53 2355.42,1781.39 IC1.47
TELEM: IC1.40 pad.0.8MM@1967.78,1818.32 | length 776.4
  Top Layer w10: IC1.40 2493.21,1908.21 cw(c2510,1908.21) 2510,1925 v2(2510.6,1925)
  Layer 2 w10: v1(1994,1819) 2006,1819 ccw(c2006,1919) 2106,1919 cw(c2235.32,1919) 2235.32,2048.32 2340.68,2048.32 cw(c2340.68,1977) 2412,1977 ccw(c2464,1977) 2464,1925 v2(2510.6,1925)
  Bottom Layer w10: v2(1969.86,1818.94) 1974.94,1818.94 v2@1975,1819
  other v1: 1946,1819
TP: IC1.41 | length 72.1
  Top Layer w10: v2(2447,1836) 2462,1836 ccw(c2462,1847.53) 2473.53,1847.53 IC1.41
  Layer 2 w10: v2@2444,1833 cw(c2447,1833) v2(2447,1836)
VG2: IC1.2 IC1.22 IC1.46 R1.2 R3.2 R5.2 | length 1368.6
  Top Layer w10: v2(2156,1952) R3.2 2188.99,1923.49 2194.85,1917.63 2242.14,1917.63 2248,1911.77 2248,1846 2259.42,1834.58 IC1.2 ; IC1.46 v2@2375.1,1950 ; v2@2375.1,1952 2375.1,2005.1 2389.57,2019.57 R1.2 ; v2(2376,1950) ccw(c2376,1952) v2@2378,1952 ; IC1.22 2512.9,1497.1 2525.01,1484.99 R5.2
  Layer 2 w12: v2(2156,1952) 2232,1952 ccw(c2232,1981) 2261,1981 cw(c2276.04,1981) 2276.04,1996.04 2339.2,1996.04 ; 2338.62,1996.05 cw(c2338.62,1958.67) 2339.2,1996.04 ; v1(2512,1540) 2476,1540 cw(c2476,1640) 2376,1640 v2(2376,1950) 2376,1958.67 ccw(c2338.62,1958.67) 2339.21,1996.04
VREG122: C3.2 C4.2 IC1.6 | length 187.1
  Top Layer w10: C3.2 2200.16,1870.15 2200.16,1818.04 2204.01,1814.19 2221.03,1814.19 2279.37,1755.84 IC1.6
pads on no net: IC1.11 IC1.12 IC1.14 IC1.15 IC1.16 IC1.18 IC1.19 IC1.24 IC1.39 IC1.43

## Polygon pours and split planes (outlines as drawn)
6S on Top Layer "GND" (solid, pour order 20): 1970,1519 2134,1519 cw(c2134,1491) 2162,1491 ccw(c2223,1491) 2223,1430 2811,1430 cw(c2811,1424) 2817,1424 ccw(c2826,1424) 2826,1415 2859,1415 cw(c2859,1413) 2861,1413 2861,1356 cw(c2857,1356) 2857,1352 1947,1352 cw(c1947,1376) 1923,1376 1923,1472 cw(c1970,1472)
GND on Top Layer "GND" (solid, pour order 16): 2364,2090 ccw(c2356,2090) 2356,2098 2155,2098 cw(c2155,2121) 2132,2121 ccw(c2114,2121) 2114,2139 2057,2139 2057,1796 ccw(c2089,1796) 2089,1764 cw(c2089,1746) 2107,1746 2107,1745 ccw(c2141,1745) 2141,1711 2172,1711 ccw(c2172,1717) 2178,1717 2178,1963 cw(c2198,1963) 2198,1983 ccw(c2198,1985) 2200,1985 2200,2008 ccw(c2198,2008) 2198,2010 2192,2010 cw(c2192,2025) 2177,2025 2177,2070 cw(c2190,2070) 2190,2083 2230,2083 cw(c2230,2072) 2241,2072 2241,2019 ccw(c2251,2019) 2251,2009 2358,2009 ccw(c2358,2016) 2365,2016
GND on Top Layer "GND" (solid, pour order 15): 2408,1899 2421,1899 2421,1833 ccw(c2440,1833) 2440,1814 2523,1814 cw(c2523,1789) 2548,1789 2548,1649 cw(c2540,1649) 2540,1641 2361,1641 cw(c2361,1642) 2360,1642 cw(c2360,1658) 2344,1658 2344,1746 cw(c2356,1746) 2356,1758 2364,1758 ccw(c2364,1764) 2370,1764 2370,1830 cw(c2383,1830) 2383,1843 2401,1843 ccw(c2401,1850) 2408,1850
GND on Top Layer "GND" (solid, pour order 4): 2834,2080 2922,2080 2922,1437 2834,1437
MOTOR2C on Top Layer "GND" (solid, pour order 3): 3280,1596 3374,1596 ccw(c3374,1600) 3378,1600 cw(c3394,1600) 3394,1616 3452,1616 cw(c3452,1596) 3472,1596 3472,1476 cw(c3452,1476) 3452,1456 3284,1456 cw(c3284,1460) 3280,1460
MOTOR2B on Top Layer "GND" (solid, pour order 2): 3280,1816 3376,1816 ccw(c3376,1824) 3384,1824 cw(c3396,1824) 3396,1836 3452,1836 cw(c3452,1816) 3472,1816 3472,1696 cw(c3450,1696) 3450,1674 3280,1674
MOTOR2A on Top Layer "GND" (solid, pour order 1): 3280,2036 3352,2036 ccw(c3352,2042) 3358,2042 cw(c3384,2042) 3384,2068 3454,2068 cw(c3454,2046) 3476,2046 3476,1924 cw(c3452,1924) 3452,1900 3280,1900
6S on Top Layer "GND" (solid, pour order 0): 2960,2134 cw(c2986,2134) 2986,2160 3234.06,2160 cw(c3234,2140) 3254,2140 3254,1420 cw(c3234,1420) 3234,1400 2980,1400 cw(c2980,1420) 2960,1420
MOTOR2C on Bottom Layer "GND" (solid, pour order 19): 3277,1646 3449,1646 cw(c3449,1624) 3471,1624 3471,1481 cw(c3452,1481) 3452,1462 3278,1462 cw(c3278,1463) 3277,1463
MOTOR2B on Bottom Layer "GND" (solid, pour order 18): 3290,1867 3459,1867 cw(c3459,1853) 3473,1853 3473,1696 cw(c3459,1696) 3459,1682 3289,1682
MOTOR2A on Bottom Layer "GND" (solid, pour order 17): 3291,2087 3459,2087 cw(c3459,2068) 3478,2068 3478,1927 cw(c3451,1927) 3451,1900 3295,1900 cw(c3295,1904) 3291,1904
GND on Bottom Layer "GND" (solid, remove dead copper, pour order 14): 1960,2144 2105,2144 cw(c2105,2105) 2144,2105 ccw(c2155,2105) 2155,2094 2643.5,2094 cw(c2643.5,2069.96) 2667.54,2069.96 ccw(c2701.5,2069.96) 2701.5,2036 3121,2036 3121,1463 cw(c3120,1463) 3120,1462 2928.39,1462 ccw(c2928.39,1453.61) 2920,1453.61 cw(c2913.39,1453.61) 2913.39,1447 2179,1447 cw(c2179,1501) 2125,1501 ccw(c2059,1501) 2059,1567 1982,1567 cw(c1982,1619) 1930,1619 1930,2114 cw(c1960,2114)
GND on Bottom Layer "GND" (solid, pour order 11): 3120,1462 2927,1462 ccw(c2927,1455) 2920,1455 cw(c2913,1455) 2913,1448 2853,1448 cw(c2853,1465) 2836,1465 2836,1587 cw(c2849,1587) 2849,1600 3045,1600 cw(c3045,1598) 3047,1598 ccw(c3049,1598) 3049,1596 3120,1596
GND on Bottom Layer "GND" (solid, pour order 7): 3121,1817 2871,1817 ccw(c2871,1806) 2860,1806 cw(c2846,1806) 2846,1792 2845,1792 ccw(c2845,1781) 2834,1781 2834,1682 ccw(c2845,1682) 2845,1671 3117,1671 ccw(c3117,1675) 3121,1675
GND on Bottom Layer "GND" (solid, pour order 6): 3121,2036 2855,2036 ccw(c2855,2015) 2834,2015 2834,1856 ccw(c2849,1856) 2849,1841 2911,1841 ccw(c2911,1853) 2923,1853 cw(c2935,1853) 2935,1865 3024,1865 ccw(c3024,1878) 3037,1878 cw(c3052,1878) 3052,1893 3121,1893
GND on Layer 1 "GND" (solid, pour order 5): 1861,2216 ccw(c1879,2216) 1879,2198 3519,2198 3519,1302 ccw(c3500,1302) 3500,1321 1866,1321
6S on Layer 5 "GND" (solid, pour order 9): 1909,2191 cw(c1914,2191) 1914,2196 cw(c1980,2196) 1980,2262 3252,2262 cw(c3252,2261) 3253,2261 3253,1216 ccw(c3235,1216) 3235,1234 1877,1234
GND on Layer 3 "GND" (solid, pour order 13): 1876,2204 3481,2204 cw(c3481,2166) 3519,2166 3519,1342 cw(c3485,1342) 3485,1308 1874,1308 ccw(c1874,1285) 1851,1285

## Silkscreen, mask and mechanical layers (free items; w line width, h text height)
Top Overlay:
  text "-" at 2131,2058.34 h50
  text "SWD" at 2641,2034.58 h35
  text "CLK" at 2560,2033.58 h35
  text "TEL" at 2016.08,1840 h25 r270
  text "SIG" at 2016.73,1757 h25 r270
  text "GND" at 2718.05,1539.46 h50
  text "REV_A" at 2191,1429.78 h25
  text "+" at 2110,1427.02 h50
Mechanical 1:
  lines w10: 1910,1380 ccw(c1950,1380) 1950,1340 3450,1340 ccw(c3450,1380) 3490,1380 3490,2090 3490,2130 ccw(c3450,2130) 3450,2170 3090,2170 1950,2170 ccw(c1950,2130) 1910,2130 1910,1380

## Dimensions
1910,2130 to 3490,2090 on Mechanical 1